# Altium PCB TBB-AUDIO_RA8D1_INTERPOSER_v2.PcbDoc
Units mm, origin at the board's own origin, x right, y up, seen from the top; angles counter-clockwise.
Board outline 101 x 59.5 mm, 2 copper layers (Top Layer, Bottom Layer), stack 1.264 mm thick; 11 components, 10 nets, 110 pads, 6 vias.
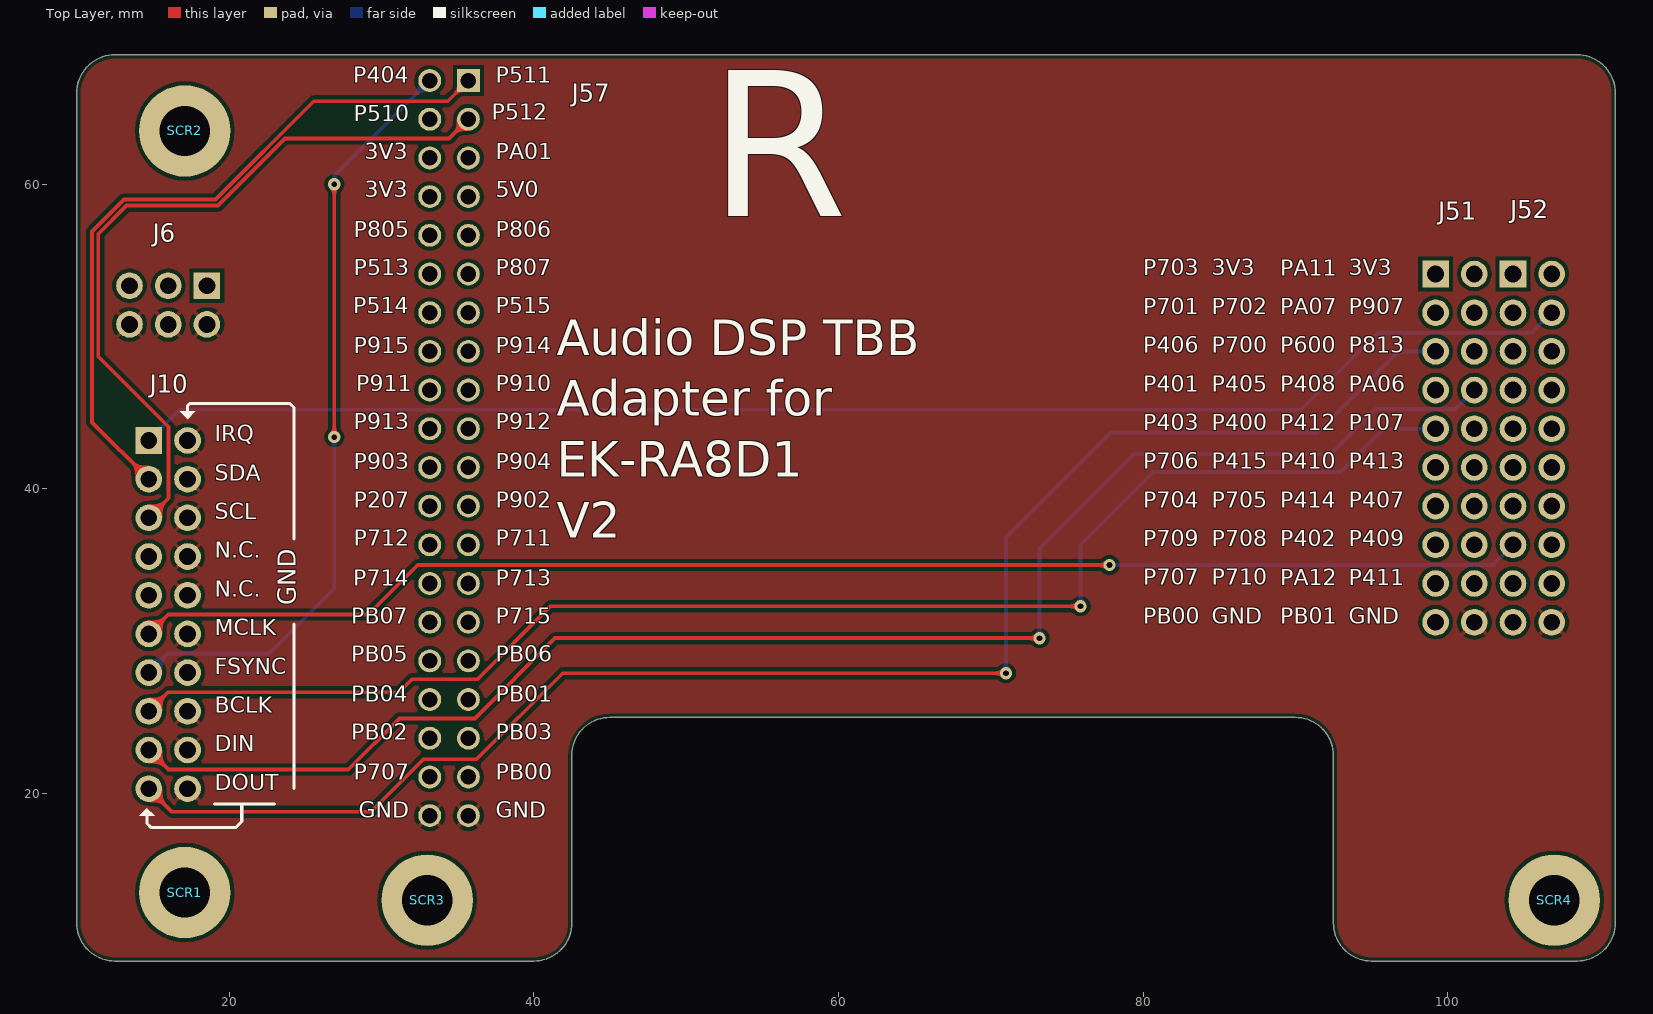
[diagram p0: Top Layer view]
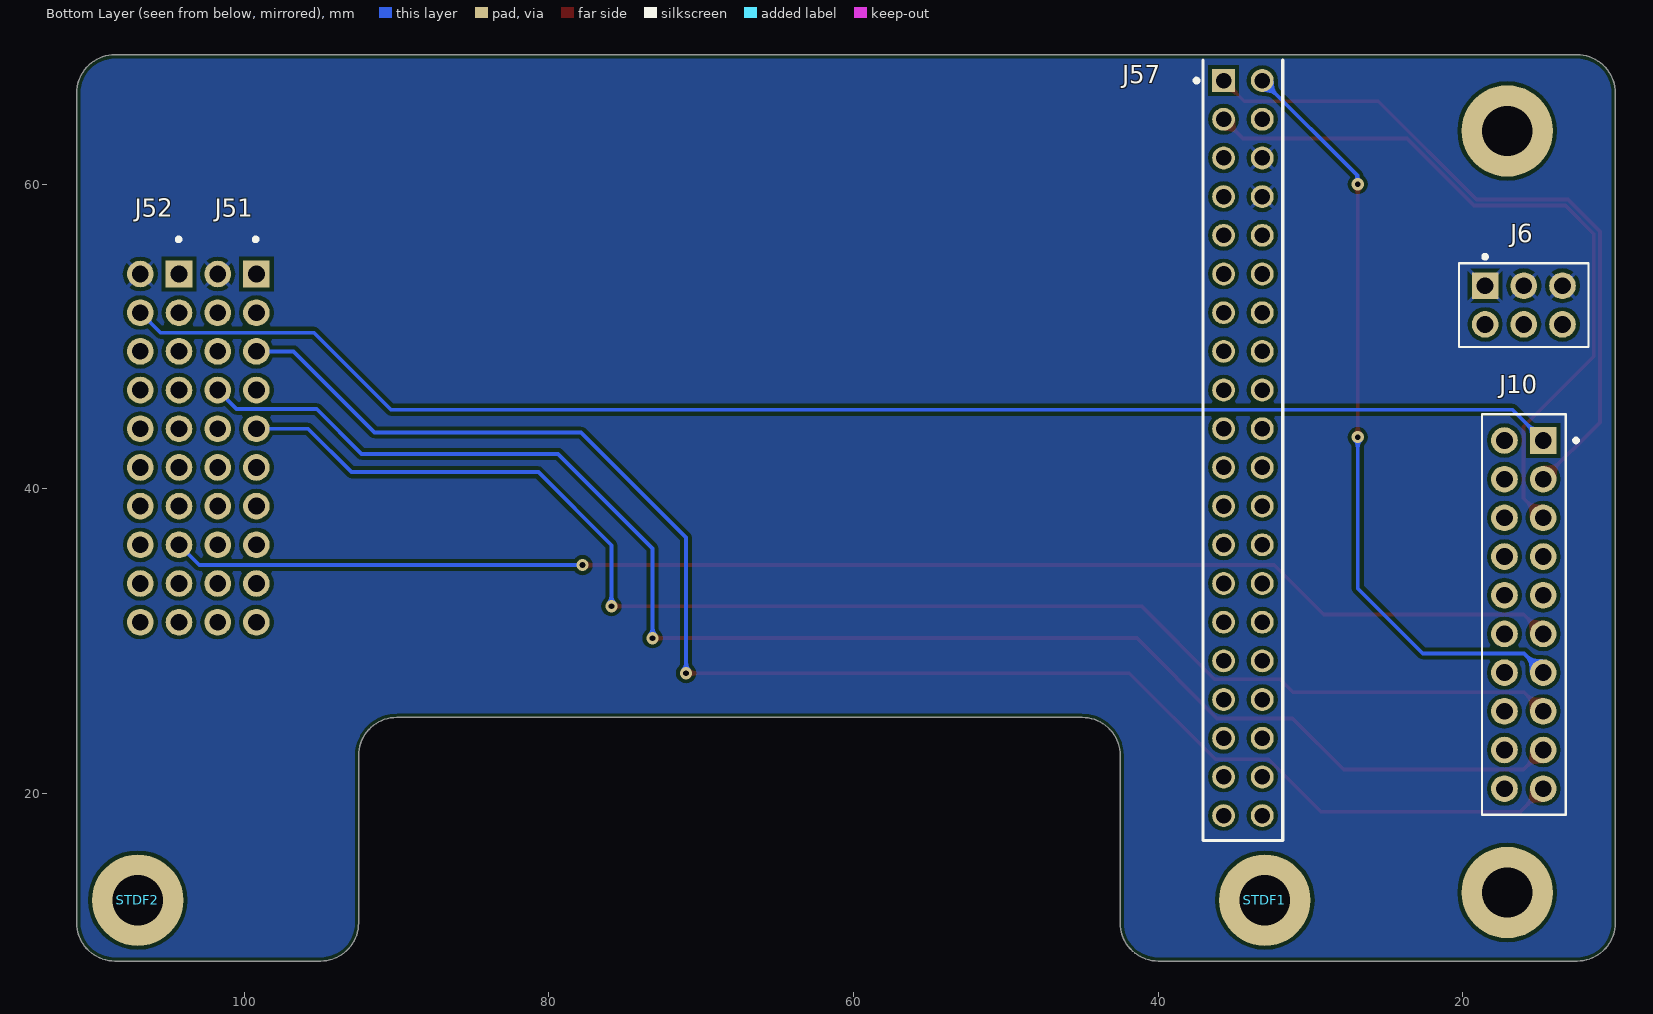
[diagram p1: Bottom Layer view, seen from below]
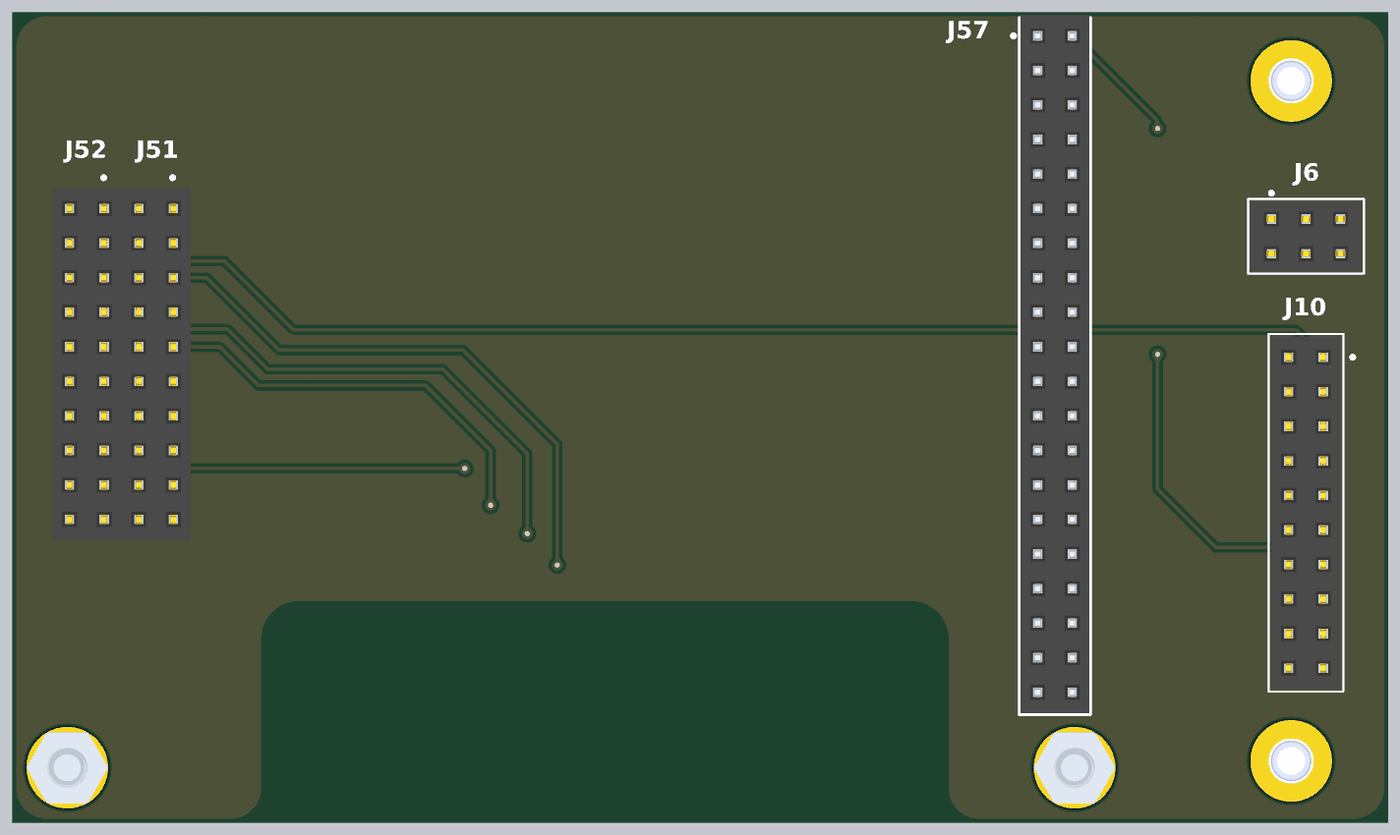
[diagram p2: 3D render of the assembled board from below, using the file's embedded part models]

## Layer stack, top to bottom
Top Solder: solder mask 0.02, SM-013, Dk 4.1
Top Layer: signal copper 0.035
Dielectric 3: core 1.194, VT-47, Dk 4.4
Bottom Layer: signal copper 0.035
Bottom Solder: solder mask 0.02, SM-013, Dk 4.1

## Board outline
10,66 cw(c12.5,66) 12.5,68.5 108.5,68.5 cw(c108.5,66) 111,66 111,11.5 cw(c108.5,11.5) 108.5,9 95,9 cw(c95,11.5) 92.5,11.5 92.5,22.5 ccw(c90,22.5) 90,25 45,25 ccw(c45,22.5) 42.5,22.5 42.5,11.5 cw(c40,11.5) 40,9 12.5,9 cw(c12.5,11.5) 10,11.5 10,66

## Design rules (kind name [scope] priority, off if disabled: settings)
BoardOutlineClearance [not HasFootprint('RF_SMA_EDGE_S')] p1: gap=0.25 ignorepadtopadclearanceinfootprint=FALSE
BoardOutlineClearance BoardOutlineClearance_1 [HasFootprint('RF_SMA_EDGE_S')] p2: gap=0.1 ignorepadtopadclearanceinfootprint=FALSE
Clearance Clearance_Analog [InNetClass('Analog')] p1: gap=0.2 ignorepadtopadclearanceinfootprint=TRUE
Clearance Clearance_Power [InNetClass('Power')] p2: gap=0.25 ignorepadtopadclearanceinfootprint=TRUE
Clearance [All] p3: gap=0.15 ignorepadtopadclearanceinfootprint=TRUE
ComponentClearance ComponentClearance_J51-J52 [InComponentClass('j51-j52') vs InComponentClass('j51-j52')] p1: gap=-0.05 collisioncheckmode=3 verticalgap=0 showdistances=FALSE
ComponentClearance ComponentClearance_screws [InComponentClass('mechanical') vs InComponentClass('mechanical')] p2: gap=0 collisioncheckmode=3 verticalgap=-6 showdistances=FALSE
ComponentClearance [not InComponentClass('mechanical')] p3: gap=0 collisioncheckmode=3 verticalgap=0 showdistances=FALSE
HoleSize [All] p1: absolutevalues=TRUE maxlimit=3.3 minlimit=0.025 maxpercent=80.000 minpercent=20.000
MinimumSolderMaskSliver [All] p1: minsoldermaskwidth=0.075
PolygonConnect [All] p1: connectstyle=Relief reliefconductorwidth=0.254 reliefentries=4 polygonreliefangle="45 Angle" airgapwidth=0.254
RoutingVias [All] p1: holewidth=0.375 width=0.8 viastyle="Through Hole" minholewidth=0.375 minwidth=0.8 maxholewidth=0.375 maxwidth=0.8
SilkToSilkClearance [All] p1: silktosilkclearance=0.2
SilkToSolderMaskClearance [IsPad] p1: minsilkscreentomaskgap=0.2 clearancetoexposedcopper=TRUE
SolderMaskExpansion [All] p1: expansion=0.102 istentingtop=FALSE
SupplyNets "Schematic Supply Nets_1" [InNet('P3V3')] p1: voltage=3.300
SupplyNets "Schematic Supply Nets" [InNet('GND')] p2: voltage=0.000
Width Width_Analog [InNetClass('Analog')] p1: maxlimit=5 minlimit=0.15 preferedwidth=0.5
Width Width_Power [InNetClass('Power')] p2: maxlimit=10 minlimit=0.2 preferedwidth=1
Width [All] p3: maxlimit=0.508 minlimit=0.127 preferedwidth=0.254
25 further rules are at their usual default settings.

## Classes and differential pairs
component class j51-j52: J51 J52
component class mechanical: SCR1 SCR2 SCR3 SCR4 STDF1 STDF2
net class I2S: BCLK DIN DOUT FSYNC MCU_MCLK
net class Digital: BCLK CODEC_IRQ DIN DOUT FSYNC I2C_SCL I2C_SDA MCU_MCLK
component class Connectors: J6 J10 J51 J52 J57
net class Power: GND P3V3

## Components (designator, comment, footprint, x,y, rotation, side; value= is the part's Value field where it differs from the comment)
J6 "CON-100143-01" Wurth_61300621821_REVERSE_PINS 16,52.07 r180 bottom
J10 "CON-100144-01" Wurth_61302021821_REVERSE_PINS 16,31.75 r270 bottom
J51 "CON-100144-01" Wurth_61302021821_REVERSE_PINS_DOT_ONLY 100.48,42.68 r270 bottom
J52 "CON-100144-01" Wurth_61302021821_REVERSE_PINS_DOT_ONLY 105.56,42.68 r270 bottom
J57 "CON-100091-01" Wurth_61304021821 34.44,42.68 r270 bottom
SCR1 "Comment" KEYSTONE_SCREW_M3_6mm 17.09,13.5 r0 top
SCR2 "Comment" KEYSTONE_SCREW_M3_6mm 17.09,63.5 r0 top
SCR3 "Comment" KEYSTONE_SCREW_M3_6mm 33,13 r0 top
SCR4 "Comment" KEYSTONE_SCREW_M3_6mm 107,13 r0 top
STDF1 "Comment" Essentra_STDF_MF_M3_11mm_reverse 33,13 r180 bottom
STDF2 "Comment" Essentra_STDF_MF_M3_11mm_reverse 107,13 r180 bottom

## Footprints (in the part's own frame and the unit in brackets; to place one, negate y for a bottom-side part, rotate by r counter-clockwise, add the part's x,y. Pads: shape width x height; smd on the part's side, far side on the other; paste and mask are expansions set on the pad)
Essentra_STDF_MF_M3_11mm_reverse [mm] "Standoff, Nylon, Male-Fem, M3x0.5, 11mm tall, 6mm Hex"
  body extent -3,-2.6 3,2.6, height 15.76
KEYSTONE_SCREW_M3_6mm [mm] "Screw, M3 x 6mm PH Slotted, Nylon"
  body extent -2.7,-2.69 2.7,2.69, height 1.35
Wurth_61300621821_REVERSE_PINS [mm] "Wurth Socket Female 0.1\" pitch 6pos 2x3, 3.1mm pins, 8.5mm body, pin numbers reversed"
  rect 1.75x1.75 hole 1.1: 1(-2.54,1.27)
  round 1.75 hole 1.1: 2(-2.54,-1.27) 3(0,1.27) 4(0,-1.27) 5(2.54,1.27) 6(2.54,-1.27)
  silkscreen extent -4.25,-2.75 4.25,3.3, body extent -4.06,-2.54 4.06,2.54, height 8.5
Wurth_61302021821_REVERSE_PINS [mm] "Wurth Socket Female 0.1\" pitch 20pos 2x10 TH, 3.1mm pins, 8.5mm body, pin numbers reversed"
  rect 1.75x1.75 hole 1.1: 1(-11.43,1.27)
  round 1.75 hole 1.1: 2(-11.43,-1.27) 3(-8.89,1.27) 4(-8.89,-1.27) 5(-6.35,1.27) 6(-6.35,-1.27) 7(-3.81,1.27) 8(-3.81,-1.27) 9(-1.27,1.27) 10(-1.27,-1.27) 11(1.27,1.27) 12(1.27,-1.27) 13(3.81,1.27) 14(3.81,-1.27) 15(6.35,1.27) 16(6.35,-1.27) 17(8.89,1.27) 18(8.89,-1.27) 19(11.43,1.27) 20(11.43,-1.27)
  silkscreen extent -13.15,-2.75 13.15,3.55, body extent -12.95,-2.54 12.95,2.54, height 8.5
Wurth_61302021821_REVERSE_PINS_DOT_ONLY [mm] "Wurth Socket Female 0.1\" pitch 20pos 2x10 TH, 3.1mm pins, 8.5mm body, pin numbers reversed"
  rect 1.75x1.75 hole 1.1: 1(-11.43,1.27)
  round 1.75 hole 1.1: 2(-11.43,-1.27) 3(-8.89,1.27) 4(-8.89,-1.27) 5(-6.35,1.27) 6(-6.35,-1.27) 7(-3.81,1.27) 8(-3.81,-1.27) 9(-1.27,1.27) 10(-1.27,-1.27) 11(1.27,1.27) 12(1.27,-1.27) 13(3.81,1.27) 14(3.81,-1.27) 15(6.35,1.27) 16(6.35,-1.27) 17(8.89,1.27) 18(8.89,-1.27) 19(11.43,1.27) 20(11.43,-1.27)
  silkscreen extent -13.82,1.09 -13.58,1.34, body extent -12.95,-2.54 12.95,2.54, height 8.5
Wurth_61304021821 [mm] "Wurth Elektronik 2.54mm 2x20 TH straight socket, 8.5mm body, 3.1mm solder post"
  rect 1.5x1.5 hole 1.02: 1(-24.13,-1.27)
  round 1.5 hole 1.02: 2(-24.13,1.27) 3(-21.59,-1.27) 4(-21.59,1.27) 5(-19.05,-1.27) 6(-19.05,1.27) 7(-16.51,-1.27) 8(-16.51,1.27) 9(-13.97,-1.27) 10(-13.97,1.27) 11(-11.43,-1.27) 12(-11.43,1.27) 13(-8.89,-1.27) 14(-8.89,1.27) 15(-6.35,-1.27) 16(-6.35,1.27) 17(-3.81,-1.27) 18(-3.81,1.27) 19(-1.27,-1.27) 20(-1.27,1.27) 21(1.27,-1.27) 22(1.27,1.27) 23(3.81,-1.27) 24(3.81,1.27) 25(6.35,-1.27) 26(6.35,1.27) 27(8.89,-1.27) 28(8.89,1.27) 29(11.43,-1.27) 30(11.43,1.27) 31(13.97,-1.27) 32(13.97,1.27) 33(16.51,-1.27) 34(16.51,1.27) 35(19.05,-1.27) 36(19.05,1.27) 37(21.59,-1.27) 38(21.59,1.27) 39(24.13,-1.27) 40(24.13,1.27)
  silkscreen extent -25.47,-3.17 25.78,2.62, body extent -25.65,-2.54 25.65,2.54, height 8.45

## Part data
J6: "Wurth Socket 2.54mm pitch 6pos 2x3, 3.1mm tail, 8.5mm body, gold plate", Manufacturer="Wurth Elektronik", Manufacturer Part Number 1=61300621821, Manufacturer 1="Wurth Elektronik", Mfg="Wurth Elektronik", Mfg Part Number=61300621821, Pitch=2.54mm, PN=61300621821, Positions=6, Supplier 1=Newark, Supplier 2=DigiKey, Supplier 3=Mouser, Supplier Part Number 1=61300621821, Supplier Part Number 2=732-61300621821-ND, Supplier Part Number 3=710-61300621821, System=Connector
J10 J51 J52: "Wurth Socket 2.54mm pitch 20pos 2x10, 3.1mm tail, 8.5mm body, gold plate", Manufacturer="Wurth Elektronik", Manufacturer Part Number 1=61302021821, Manufacturer 1="Wurth Elektronik", Mfg="Wurth Elektronik", Mfg Part Number=61302021821, Pitch=2.54mm, PN=61302021821, Positions=20, Supplier 1=Newark, Supplier 2=DigiKey, Supplier 3=Mouser, Supplier Part Number 1=61302021821, Supplier Part Number 2=732-61302021821-ND, Supplier Part Number 3=710-61302021821, System=Connector
J57: "Wurth Socket Header 2.54mm pitch 40pos 2x20 TH", Legacy Part Number=160-10004309, Manufacturer="Wurth Elektronik", Manufacturer Part Number 1=61304021821, Supplier Part Number 1=47AC7191, GENDER=Socket, Manufacturer 1="Wurth Elektronik", Mfg="Wurth Elektronik", Mfg Part Number=61304021821, Pitch=2.54mm, PN=61304021821, Positions=40, Supplier 1=Newark, Supplier 2=Mouser, Supplier 3=Digikey, Supplier 4=Farnell, Supplier Part Number 2=710-61304021821, Supplier Part Number 3=732-61304021821-ND, Supplier Part Number 4=2827916, System=Connector

## Free pads (board coordinates)
  round 6 hole 3.3: MH1(17.09,13.5) MH1(17.09,63.5) MH1(33,13) MH1(107,13)

## Via types
v1: diameter 0.8, hole 0.375, Top Layer to Bottom Layer, tented both sides, 6 vias

## Nets (pads, with @x,y where several pads share a name; then routed paths per layer and width w, separated by ;. In a path a pad name is that pad's centre, name@x,y a point inside that pad or via, vN(x,y) a via of type N, cw(c..) or ccw(c..) an arc to the next point about the centre after c; other vN are vias at no path point)
BCLK: J10.15 J51.9 | length 94.5
  Top Layer w0.254: J10.15 15.982,26.652 31.152,26.652 32,27.5 36.3,27.5 41.1,32.3 v1(75.9,32.3)
  Bottom Layer w0.254: v1(75.9,32.3) 75.9,36.3 80.7,41.1 92.975,41.1 95.825,43.95 J51.9
CODEC_IRQ: J10.1 J52.4 | length 95.6
  Bottom Layer w0.254: J10.1 16.75,45.2 90.375,45.2 95.425,50.25 105.51,50.25 J52.4
DIN: J10.17 J51.8 | length 101.3
  Top Layer w0.254: J10.17 16.018,21.572 27.822,21.572 31.184,24.934 36.134,24.934 41.4,30.2 v1(73.2,30.2)
  Bottom Layer w0.254: v1(73.2,30.2) 73.2,36.1 79.4,42.3 92.3,42.3 95.25,45.25 100.51,45.25 J51.8
DOUT: J10.19 J51.5 | length 102.8
  Top Layer w0.254: J10.19 16.25,18.8 29.3,18.8 32.75,22.25 36.25,22.25 41.9,27.9 v1(71,27.9)
  Bottom Layer w0.254: v1(71,27.9) 71,36.8 77.9,43.7 91.45,43.7 96.78,49.03 J51.5
FSYNC: J10.13 J57.2 | length 50.4
  Top Layer w0.254: v1(26.9,43.4) v1(26.9,60)
  Bottom Layer w0.254: J10.13 15.99,29.2 22.631,29.2 26.9,33.469 v1(26.9,43.4) ; v1(26.9,60) 26.928,60.028 26.928,60.568 J57.2
GND: J6.2 J6.4 J6.6 J10.2 J10.4 J10.6 J10.8 J10.10 J10.12 J10.14 J10.16 J10.18 J10.20 J51.20 J52.20 J57.39 J57.40
I2C_SCL: J10.5 J57.3 | length 48.5
  Top Layer w0.254: J10.5 16.018,39.388 16.018,44.082 11.404,48.696 11.404,56.733 13.267,58.596 19.267,58.596 23.671,63 34.44,63 J57.3
I2C_SDA: J10.3 J57.1 | length 46.6
  Top Layer w0.254: J10.3 11,44.37 11,56.9 13.1,59 19.1,59 25.553,65.453 34.353,65.453 J57.1
MCU_MCLK: J10.11 J52.15 | length 92
  Top Layer w0.254: J10.11 16,31.75 29.13,31.75 32.38,35 v1(77.8,35)
  Bottom Layer w0.254: v1(77.8,35) 102.96,35 J52.15
P3V3: J6.1 J6.3 J6.5 J51.2 J52.2 J57.6 J57.8
pads on no net: J10.7 J10.9 J51.1 J51.3 J51.4 J51.6 J51.7 J51.10 J51.11 J51.12 J51.13 J51.14 J51.15 J51.16 J51.17 J51.18 J51.19 J52.1 J52.3 J52.5 J52.6 J52.7 J52.8 J52.9 J52.10 J52.11 J52.12 J52.13 J52.14 J52.16 J52.17 J52.18 J52.19 J57.4 J57.5 J57.7 J57.9 J57.10 J57.11 J57.12 J57.13 J57.14 J57.15 J57.16 J57.17 J57.18 J57.19 J57.20 J57.21 J57.22 J57.23 J57.24 J57.25 J57.26 J57.27 J57.28 J57.29 J57.30 J57.31 J57.32 J57.33 J57.34 J57.35 J57.36 J57.37 J57.38

## Polygon pours and split planes (outlines as drawn)
GND on Top Layer "Top Layer-GND" (solid, remove dead copper, pour order 15): 90.763,24.87 cw(c89.96,22.46) 92.5,22.46 92.5,11.54 ccw(c95.04,11.54) 95.04,9 108.46,9 ccw(c108.46,11.54) 111,11.54 111,65.96 ccw(c108.46,65.96) 108.46,68.5 12.547,68.5 ccw(c12.54,65.96) 10.34,67.23 ccw(c12.539,65.96) 10,65.96 10,12.542 ccw(c10.999,12.538) 10,12.532 10,11.54 ccw(c12.54,11.54) 12.54,9 39.96,9 ccw(c39.96,11.54) 42.5,11.54 42.5,22.455 cw(c45.04,22.46) 45.04,25 89.96,25 cw(c89.96,22.463)
P3V3 on Bottom Layer "Bottom Layer-P3V3" (solid, remove dead copper, pour order 14): 90.763,24.87 cw(c89.96,22.46) 92.5,22.46 92.5,11.54 ccw(c95.04,11.54) 95.04,9 108.46,9 ccw(c108.46,11.54) 111,11.54 111,65.96 ccw(c108.46,65.96) 108.46,68.5 12.547,68.5 ccw(c12.54,65.96) 10.34,67.23 ccw(c12.539,65.96) 10,65.96 10,12.542 ccw(c10.999,12.538) 10,12.532 10,11.54 ccw(c12.54,11.54) 12.54,9 39.96,9 ccw(c39.96,11.54) 42.5,11.54 42.5,22.455 cw(c45.04,22.46) 45.04,25 89.96,25 cw(c89.96,22.463)

## Silkscreen, mask and mechanical layers (free items; w line width, h text height)
Top Overlay:
  region: 17.272,44.577 17.78,45.085 16.764,45.085
  region: 14.605,19.05 14.097,18.542 15.113,18.542
  lines w0.2: 14.605,18.923 14.605,18.034 14.859,17.78 20.447,17.78 20.828,18.161 20.828,19.304 ; 17.272,44.831 17.272,45.466 17.399,45.593 24.003,45.593 24.257,45.339 24.257,43.18 24.257,36.703 ; 19.05,19.304 22.987,19.304 ; 24.257,20.32 24.257,31.115
  text "P404" at 28.145,66.293 h1.8
  text "P511" at 37.5,66.293 h1.8
  text "J57" at 42.5,65.017 h2
  text "P512" at 37.25,63.887 h1.8
  text "P510" at 28.171,63.793 h1.8
  text "3V3" at 28.902,61.293 h1.8
  text "PA01" at 37.5,61.293 h1.8
  text "3V3" at 28.902,58.793 h1.8
  text "5V0" at 37.5,58.793 h1.8
  text "J52" at 104.125,57.392 h2
  text "J51" at 99.375,57.267 h2
  text "P805" at 28.168,56.168 h1.8
  text "P806" at 37.5,56.168 h1.8
  text "J6" at 15,55.817 h2
  text "R" at 51.5,54.097 h20
  text "P513" at 28.17,53.668 h1.8
  text "P807" at 37.5,53.668 h1.8
  text "P703" at 80,53.653 h1.8
  text "3V3" at 84.5,53.653 h1.8
  text "PA11" at 89,53.646 h1.8
  text "3V3" at 93.5,53.653 h1.8
  text "P514" at 28.145,51.168 h1.8
  text "P515" at 37.5,51.168 h1.8
  text "P701" at 80,51.113 h1.8
  text "P702" at 84.5,51.113 h1.8
  text "PA07" at 89,51.113 h1.8
  text "P907" at 93.5,51.113 h1.8
  text "P406" at 80,48.573 h1.8
  text "P700" at 84.5,48.573 h1.8
  text "P600" at 89,48.573 h1.8
  text "P813" at 93.5,48.573 h1.8
  text "P915" at 28.168,48.543 h1.8
  text "P914" at 37.5,48.543 h1.8
  text "P911" at 28.342,46.043 h1.8
  text "P910" at 37.5,46.043 h1.8
  text "P401" at 80,46.033 h1.8
  text "P405" at 84.5,46.033 h1.8
  text "P408" at 89,46.033 h1.8
  text "PA06" at 93.5,46.033 h1.8
  text "J10" at 14.8,45.917 h2
  text "P913" at 28.17,43.543 h1.8
  text "P912" at 37.5,43.543 h1.8
  text "P403" at 80,43.493 h1.8
  text "P400" at 84.5,43.493 h1.8
  text "P412" at 89,43.486 h1.8
  text "P107" at 93.5,43.493 h1.8
  text "IRQ" at 19.05,42.767 h1.8
  text "P706" at 80,40.953 h1.8
  text "P415" at 84.5,40.953 h1.8
  text "P410" at 89,40.953 h1.8
  text "P413" at 93.5,40.953 h1.8
  text "P903" at 28.17,40.918 h1.8
  text "P904" at 37.5,40.918 h1.8
  text "SDA" at 19.05,40.183 h1.8
  text "P207" at 28.172,38.418 h1.8
  text "P902" at 37.5,38.418 h1.8
  text "P704" at 80,38.413 h1.8
  text "P705" at 84.5,38.413 h1.8
  text "P414" at 89,38.406 h1.8
  text "P407" at 93.5,38.413 h1.8
  text "SCL" at 19.05,37.643 h1.8
  text "Audio DSP TBB / Adapter for / EK-RA8D1 / V2" at 41.5,36 h4
  text "P712" at 28.175,35.911 h1.8
  text "P711" at 37.5,35.911 h1.8
  text "P709" at 80,35.873 h1.8
  text "P708" at 84.5,35.873 h1.8
  text "P402" at 89,35.873 h1.8
  text "P409" at 93.5,35.873 h1.8
  text "N.C." at 19.05,35.103 h1.8
  text "P707" at 80,33.333 h1.8
  text "P710" at 84.5,33.333 h1.8
  text "PA12" at 89,33.326 h1.8
  text "P411" at 93.5,33.326 h1.8
  text "P713" at 37.5,33.293 h1.8
  text "P714" at 28.145,33.286 h1.8
  text "N.C." at 19.05,32.563 h1.8
  text "GND" at 24.764,32.368 h2 r90
  text "PB07" at 28.031,30.793 h1.8
  text "P715" at 37.5,30.793 h1.8
  text "PB00" at 80,30.793 h1.8
  text "GND" at 84.5,30.793 h1.8
  text "PB01" at 89,30.793 h1.8
  text "GND" at 93.5,30.793 h1.8
  text "MCLK" at 19.05,30.023 h1.8
  text "PB05" at 28.027,28.293 h1.8
  text "PB06" at 37.5,28.293 h1.8
  text "FSYNC" at 19.05,27.483 h1.8
  text "PB04" at 28.003,25.668 h1.8
  text "PB01" at 37.5,25.668 h1.8
  text "BCLK" at 19.05,24.943 h1.8
  text "PB02" at 28.033,23.168 h1.8
  text "PB03" at 37.5,23.168 h1.8
  text "DIN" at 19.05,22.403 h1.8
  text "P707" at 28.172,20.543 h1.8
  text "PB00" at 37.5,20.543 h1.8
  text "DOUT" at 19.05,19.863 h1.8
  text "GND" at 28.495,18.043 h1.8
  text "GND" at 37.5,18.043 h1.8
Board Shape:
  the board outline again, w0.05